# EAGLE board Sensor LF V.2 (EAGLE 7.2.0)
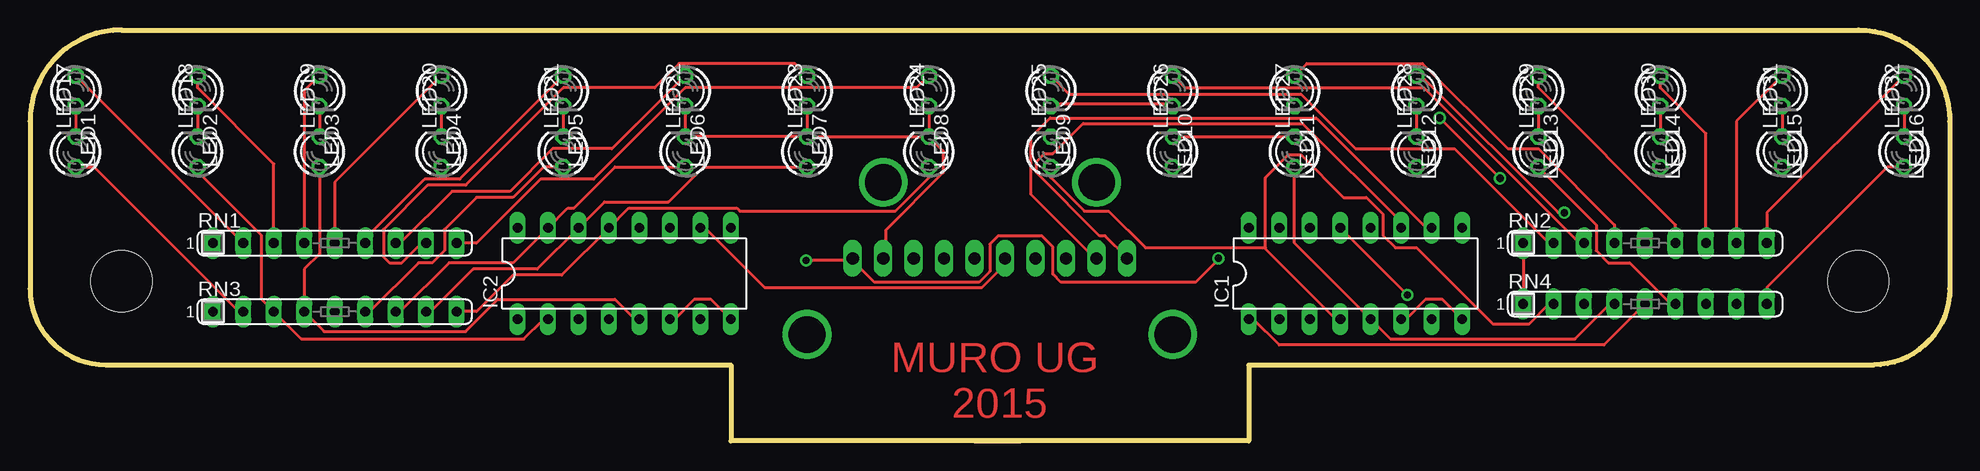
[diagram p0: board, top side]
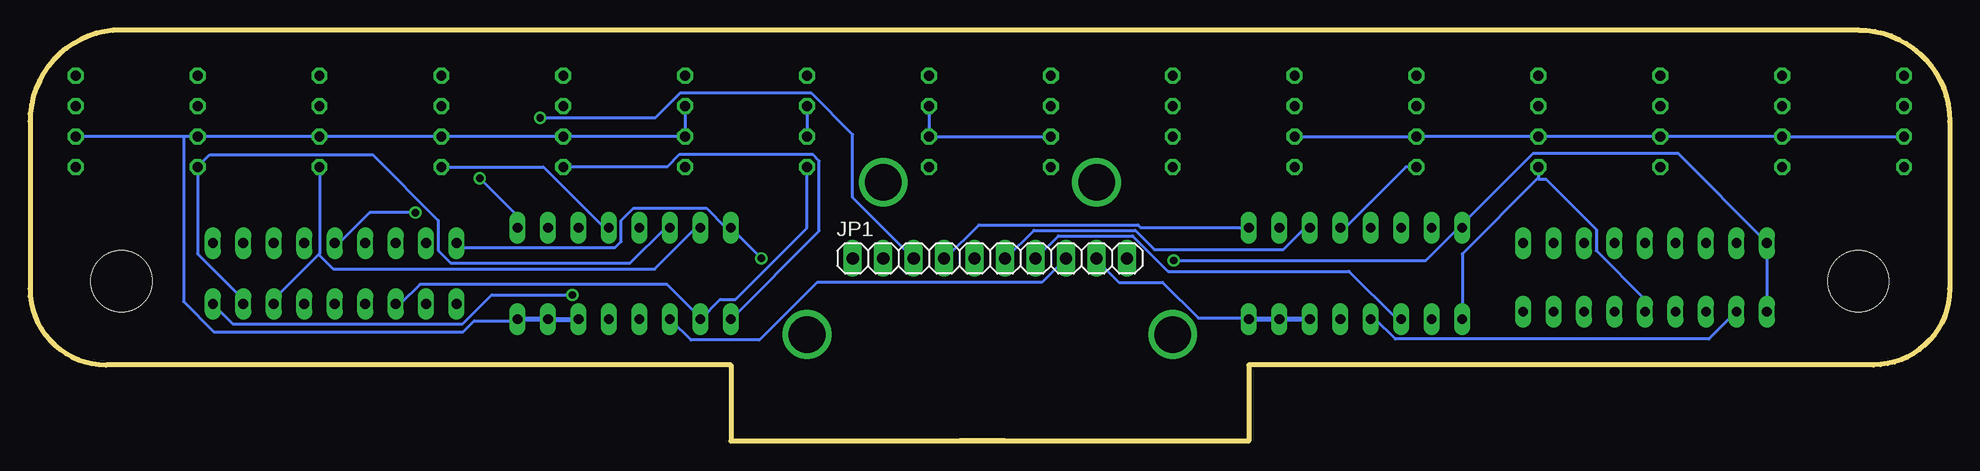
[diagram p1: board, bottom side, seen from below]

Size 160.02 x 34.29 mm. Coordinates in mm from the lower left corner, seen from the top.
Outline: 160.02,26.67 arc90 152.4,34.29 7.62,34.29 arc90 0,26.67 0,12.7 arc90 6.35,6.35 58.42,6.35 58.42,0 101.6,0 101.6,6.35 153.67,6.35 arc90 160.02,12.7
Outline: 160.02,27.3 160.02,26.67
Outline: 160.02,26.67 160.02,12.07
Outline: 78.74,0 82.55,0
Copper layers (1*16): Top 0.035mm / dielectric 1.5mm / Bottom 0.035mm
Design rules "default": minimum track width 10mil, minimum drill 24mil, track to track 8mil, track to pad 8mil, pad to pad 8mil, via to via 8mil, smd to smd 8mil, copper to edge 40mil, drill to drill 8mil, minimum pad ring 10mil, minimum via ring 8mil, stop-mask expansion 4mil, vias tented up to drill 0mil, thermal gap 10mil
Net classes: 0 default: width 0.051 mm, clearance 0.051 mm
Holes 5.08 mm at 7.62,13.34 152.4,13.34

## Footprints (pad centres in the part's own frame; a part is rotated, then mirrored left to right if it is on the bottom)
DIL16 = drill 0.813 long: 1 -8.89,-3.81; 2 -6.35,-3.81; 3 -3.81,-3.81; 4 -1.27,-3.81; 5 1.27,-3.81; 6 3.81,-3.81; 7 6.35,-3.81; 8 8.89,-3.81; 9 8.89,3.81; 10 6.35,3.81; 11 3.81,3.81; 12 1.27,3.81; 13 -1.27,3.81; 14 -3.81,3.81; 15 -6.35,3.81; 16 -8.89,3.81
1X10 = drill 1.016 long: 1 -11.43,0; 2 -8.89,0; 3 -6.35,0; 4 -3.81,0; 5 -1.27,0; 6 1.27,0; 7 3.81,0; 8 6.35,0; 9 8.89,0; 10 11.43,0
LED3MM = drill 0.813 octagon: A -1.27,0; K 1.27,0
SIL9 = drill 0.813 long: 1 -10.16,0; 2 -7.62,0; 3 -5.08,0; 4 -2.54,0; 5 0,0; 6 2.54,0; 7 5.08,0; 8 7.62,0; 9 10.16,0

## Placement (x,y rotation side)
IC1  4051N  [DIL16]  110.49,13.97 0 top
IC2  4051N  [DIL16]  49.53,13.97 0 top
JP1  [1X10]  80.01,15.24 0 bottom
LED1  [LED3MM]  3.81,29.21 270 top
LED2  [LED3MM]  13.97,29.21 270 top
LED3  [LED3MM]  24.13,29.21 270 top
LED4  [LED3MM]  34.29,29.21 270 top
LED5  [LED3MM]  44.45,29.21 270 top
LED6  [LED3MM]  54.61,29.21 270 top
LED7  [LED3MM]  64.77,29.21 270 top
LED8  [LED3MM]  74.93,29.21 270 top
LED9  [LED3MM]  85.09,29.21 270 top
LED10  [LED3MM]  95.25,29.21 270 top
LED11  [LED3MM]  105.41,29.21 270 top
LED12  [LED3MM]  115.57,29.21 270 top
LED13  [LED3MM]  125.73,29.21 270 top
LED14  [LED3MM]  135.89,29.21 270 top
LED15  [LED3MM]  146.05,29.21 270 top
LED16  [LED3MM]  156.21,29.21 270 top
LED17  [LED3MM]  3.81,24.13 90 top
LED18  [LED3MM]  13.97,24.13 90 top
LED19  [LED3MM]  24.13,24.13 90 top
LED20  [LED3MM]  34.29,24.13 90 top
LED21  [LED3MM]  44.45,24.13 90 top
LED22  [LED3MM]  54.61,24.13 90 top
LED23  [LED3MM]  64.77,24.13 90 top
LED24  [LED3MM]  74.93,24.13 90 top
LED25  [LED3MM]  85.09,24.13 90 top
LED26  [LED3MM]  95.25,24.13 90 top
LED27  [LED3MM]  105.41,24.13 90 top
LED28  [LED3MM]  115.57,24.13 90 top
LED29  [LED3MM]  125.73,24.13 90 top
LED30  [LED3MM]  135.89,24.13 90 top
LED31  [LED3MM]  146.05,24.13 90 top
LED32  [LED3MM]  156.21,24.13 90 top
RN1  220  [SIL9]  25.4,16.51 0 top
RN2  220  [SIL9]  134.62,16.51 0 top
RN3  10K  [SIL9]  25.4,10.8 0 top
RN4  10K  [SIL9]  134.62,11.43 0 top

## Library data of the parts
IC1 IC2 = 40xx
JP1 = pinhead
LED1-LED32 = led
RN1-RN4 = resistor-sil

## Nets
+5V: IC1.16 IC2.16 JP1.10 RN1.1 RN2.1 RN3.1 RN4.1
GND: IC1.6 IC1.7 IC1.8 IC2.6 IC2.7 IC2.8 JP1.9 LED1.K LED2.K LED3.K LED4.K LED5.K LED6.K LED7.K LED8.K LED9.K LED10.K LED11.K LED12.K LED13.K LED14.K LED15.K LED16.K LED17.K LED18.K LED19.K LED20.K LED21.K LED22.K LED23.K LED24.K LED25.K LED26.K LED27.K LED28.K LED29.K LED30.K LED31.K LED32.K
N$1: IC1.10 JP1.2
N$2: IC1.9 JP1.3
N$3: IC2.11 JP1.6
N$4: IC2.10 JP1.5
N$5: IC2.9 JP1.4
N$6: IC2.3 JP1.7
N$15: LED1.A RN1.2
N$16: LED2.A RN1.3
N$17: IC2.4 LED17.A RN3.2
N$18: IC2.2 LED18.A RN3.3
N$19: IC2.5 LED19.A RN3.4
N$20: IC2.1 LED20.A RN3.5
N$21: IC2.12 LED21.A RN3.6
N$22: IC2.15 LED22.A RN3.7
N$23: IC2.14 LED23.A RN3.8
N$24: IC2.13 LED24.A RN3.9
N$25: IC1.4 LED25.A RN4.2
N$26: IC1.2 LED26.A RN4.3
N$27: IC1.5 LED27.A RN4.4
N$28: IC1.1 LED28.A RN4.5
N$29: IC1.12 LED29.A RN4.6
N$30: IC1.15 LED30.A RN4.7
N$31: IC1.14 LED31.A RN4.8
N$32: IC1.13 LED32.A RN4.9
N$33: LED3.A RN1.4
N$34: LED4.A RN1.5
N$35: LED5.A RN1.6
N$36: LED6.A RN1.7
N$37: LED7.A RN1.8
N$38: LED8.A RN1.9
N$39: LED9.A RN2.2
N$40: LED10.A RN2.3
N$41: LED11.A RN2.4
N$42: LED12.A RN2.5
N$43: LED13.A RN2.6
N$44: LED14.A RN2.7
N$45: LED15.A RN2.8
N$46: LED16.A RN2.9
N$47: IC1.3 JP1.8
N$49: IC1.11 JP1.1

## Tracks (layer width: path | path; a pad name or v marks a point on that pad's centre or on a via)
+5V  (via drill 0.61)
  Top 0.254: RN2.1 RN4.1 | 68.58,15.06 70.41,13.23 79.1,13.23 80.01,14.15 80.01,16.43 80.7,17.12 84.35,17.12 85.27,16.21 85.27,13.92 85.95,13.23 97.16,13.23 98.98,15.06 v99.06,15.24 | 68.58,15.06 v64.69,15.06 | 68.58,15.06 JP1.10
  Bottom 0.254: RN3.1 RN1.1 15.32,16.66 22.63,23.98 34.75,23.98 40.46,18.26 40.46,17.8 IC2.16 40.69,17.58 41.15,17.58 43.66,15.06 v64.69,15.06 | RN2.1 124.08,16.13 111.25,16.13 110.74,16.64 110.74,18.41 109.73,19.43 103.63,19.43 101.98,17.78 IC1.16 v99.06,15.24
GND
  Top 0.254: LED5.K LED21.K | LED4.K LED20.K | LED3.K LED19.K | LED1.K LED17.K | LED2.K LED18.K | LED8.K LED24.K | LED6.K LED22.K LED23.K | LED7.K LED23.K | LED23.K LED24.K | IC1.6 114.68,10.16 116.33,11.81 117.73,11.81 IC1.8 | IC2.6 53.72,10.16 55.37,11.81 56.77,11.81 IC2.8 | LED16.K LED32.K | LED15.K LED31.K | LED14.K LED30.K | LED13.K LED29.K | LED12.K LED28.K | LED26.K LED27.K | LED24.K 76.12,24.21 76.12,22.38 71.32,17.58 71.32,15.29 JP1.9 | LED9.K 85.27,28.09 95.1,28.09 LED10.K
  Bottom 0.254: LED17.K LED18.K LED19.K LED20.K LED21.K LED22.K | LED11.K LED27.K LED28.K LED29.K LED30.K LED31.K 147.22,25.4 | LED10.K LED26.K | LED9.K LED25.K LED24.K | 147.22,25.4 LED32.K | IC2.8 58.52,10.26 62.64,10.26 65.61,13.23 69.27,13.23 71.09,15.06 JP1.9 | 147.22,25.4 147.22,11.63 144.7,9.12 123.9,9.12 122.99,10.03 119.56,10.03 IC1.8
  Bottom 0.406: IC2.6 IC2.7 IC2.8 | IC1.6 IC1.7 IC1.8
N$1
  Top 0.254: IC1.10 116.81,17.8 116.36,17.8 107.21,26.95 85.04,26.95 83.44,25.35 83.44,20.55 88.7,15.29 JP1.2
N$2  (via drill 0.61)
  Top 0.254: v117.5,26.95 v122.53,21.92
  Bottom 0.254: v122.53,21.92 119.56,18.95 119.56,17.8 IC1.9 | v117.5,26.95 107.9,26.95 105.84,29.01 94.87,29.01 91.44,25.58 91.44,20.32 JP1.3
N$3
  Bottom 0.254: IC2.11 53.49,17.58 53.95,17.58 55.55,15.98 66.29,15.98 67.89,17.58 76.35,17.58 78.64,15.29 JP1.6
N$4
  Top 0.254: IC2.10 56.01,17.58 56.46,17.58 61.27,12.78 79.32,12.78 81.15,14.61 81.15,15.06 JP1.5
N$5
  Bottom 0.254: IC2.9 58.52,17.8 67.44,17.8 67.67,18.03 80.92,18.03 83.67,15.29 JP1.4
N$6
  Bottom 0.254: IC2.3 45.72,10.26 46.18,10.26 50.06,14.15 65.15,14.15 68.12,17.12 74.3,17.12 76.12,15.29 JP1.7
N$15
  Top 0.254: RN1.2 LED1.A
N$16
  Top 0.254: LED2.A 13.97,29.46 20.32,23.11 RN1.3
N$17
  Top 0.254: RN3.2 17.4,10.8 5.33,22.86 LED17.A
  Bottom 0.254: IC2.4 47.88,10.16 46.23,8.51 20.07,8.51 RN3.2
N$18
  Top 0.254: LED18.A 13.97,22.48 19.3,17.15 19.3,11.81 RN3.3 22.61,8.51 41.15,8.51 42.8,10.16 IC2.2
N$19
  Top 0.254: LED19.A 24.13,15.62 22.86,14.35 RN3.4 24.51,9.14 36.32,9.14 38.99,11.81 48.77,11.81 50.42,10.16 IC2.5
N$20
  Bottom 0.254: IC2.1 40.64,15.62 34.35,21.91 | 34.35,21.91 34.29,21.97 LED20.A | RN3.5 25.4,11.81 29.46,15.88 29.46,17.65 33.66,21.84 34.29,21.84 34.35,21.91
N$21
  Top 0.254: RN3.6 28.32,10.8 32.38,14.86 33.53,14.86 34.54,15.88 34.54,17.65 37.21,20.32 40.26,20.32 42.8,22.86 LED21.A
  Bottom 0.254: IC2.12 50.42,17.78 45.34,22.86 LED21.A
N$22
  Top 0.254: RN3.7 30.86,10.8 34.92,14.86 40.26,14.86 IC2.15 44.83,19.43 45.34,19.43 48.77,22.86 LED22.A
N$23
  Top 0.254: RN3.8 33.4,10.8 36.96,14.35 42.29,14.35 IC2.14 47.88,19.94 53.21,19.94 56.13,22.86 LED23.A
N$24
  Top 0.254: RN3.9 37.21,10.8 40.26,13.84 44.32,13.84 IC2.13 49.91,19.43 58.93,19.43 59.18,19.18 72.14,19.18 74.93,21.97 LED24.A
N$25
  Top 0.254: IC1.4 108.84,10.16 102.93,16.07 | 102.93,16.07 102.87,16.13 92.96,16.13 89.92,19.18 87.88,19.18 85.09,21.97 LED25.A | RN4.2 126.62,11.43 124.97,9.78 121.92,9.78 115.57,16.13 113.79,16.13 112.78,17.15 112.78,18.92 111.38,20.32 109.47,20.32 105.92,23.88 104.9,23.88 103,21.97 103,16.13 102.93,16.07
N$26
  Bottom 0.254: LED26.A 95.25,17.78 101.22,11.81 102.49,11.81 IC1.2 104.14,10.29 106.93,13.08 127.51,13.08 129.16,11.43 RN4.3
N$27
  Top 0.254: LED27.A 105.41,16.51 IC1.5 113.41,8.51 128.78,8.51 131.7,11.43 RN4.4
N$28
  Top 0.254: IC1.1 101.98,10.16 104.14,8 131.19,8 RN4.5
  Bottom 0.254: LED28.A 106.93,22.86 105.92,23.88 94.74,23.88 94.23,23.37 94.23,17.53 IC1.1
N$29
  Top 0.254: RN4.6 136.78,11.43 133.35,14.86 131.57,14.86 130.56,15.88 130.56,18.03 LED29.A
  Bottom 0.254: IC1.12 112.14,17.78 117.22,22.86 LED29.A
N$30
  Bottom 0.254: RN4.7 139.7,11.81 135.95,15.56 | 135.95,15.56 135.89,15.62 LED30.A | IC1.15 104.52,17.78 107.95,14.35 134.75,14.35 135.95,15.56
N$31
  Bottom 0.254: RN4.8 142.24,11.81 146.05,15.62 LED31.A 145.03,23.88 131.44,23.88 125.98,18.41 125.98,15.88 124.97,14.86 109.98,14.86 107.06,17.78 IC1.14
N$32  (via drill 0.61)
  Top 0.254: RN4.9 144.78,12.83 154.81,22.86 LED32.A | v114.81,12.19 IC1.13
  Bottom 0.254: v114.81,12.19 121.54,12.19 123.95,9.78 143.13,9.78 RN4.9
N$33
  Top 0.254: RN1.4 22.86,29.21 LED3.A
N$34
  Top 0.254: RN1.5 25.4,21.59 LED4.A
N$35
  Top 0.254: RN1.6 27.94,16.89 32.89,21.84 35.81,21.84 LED5.A
N$36
  Top 0.254: RN1.7 30.86,16.51 35.18,20.83 40.01,20.83 43.56,24.38 48.51,24.38 LED6.A
N$37
  Top 0.254: RN1.8 32.64,16.51 30.99,14.86 29.97,14.86 29.46,15.37 29.46,17.65 33.15,21.34 36.32,21.34 44.45,29.46 52.07,29.46 54.1,31.5 63.75,31.5 LED7.A
N$38
  Top 0.254: RN1.9 37.21,16.51 42.55,21.84 46.99,21.84 54.61,29.46 73.91,29.46 LED8.A
N$39
  Top 0.254: RN2.2 126.62,16.51 118.75,24.38 110.49,24.38 105.92,28.96 86.61,28.96 LED9.A
N$40
  Top 0.254: RN2.3 129.16,16.51 116.2,29.46 96.27,29.46 LED10.A
N$41
  Top 0.254: RN2.4 132.08,18.03 125.73,24.38 123.19,24.38 116.08,31.5 106.43,31.5 LED11.A
N$42  (via drill 0.61)
  Top 0.254: v127.89,19.05 127.38,19.05 115.95,30.48 LED12.A
  Bottom 0.254: RN2.5 134.24,16.51 131.7,19.05 v127.89,19.05
N$43
  Top 0.254: LED13.A 125.73,29.46 137.16,18.03 RN2.6
N$44
  Top 0.254: LED14.A 135.89,29.46 139.7,25.65 RN2.7
N$45
  Top 0.254: RN2.8 142.24,26.67 LED15.A
N$46
  Top 0.254: RN2.9 144.78,19.05 LED16.A
N$47
  Bottom 0.254: JP1.8 75.67,13.23 94.41,13.23 99.21,8.43 104.93,8.43 106.53,10.03 IC1.3
N$49
  Top 0.254: IC1.11 114.3,18.26 106.07,26.49 87.78,26.49 85.27,23.98 84.58,23.98 83.9,23.29 83.9,22.38 89.15,17.12 89.61,17.12 91.44,15.29 JP1.1
N$91  (via drill 3.05)
  other vias: 64.77,8.89
N$92  (via drill 3.05)
  other vias: 95.25,8.89
N$93  (via drill 3.05)
  other vias: 71.12,21.59
N$94  (via drill 3.05)
  other vias: 88.9,21.59

## Text on the board
Top: MURO UG | 2015